# EAGLE board LN sensor (EAGLE 9.6.2)
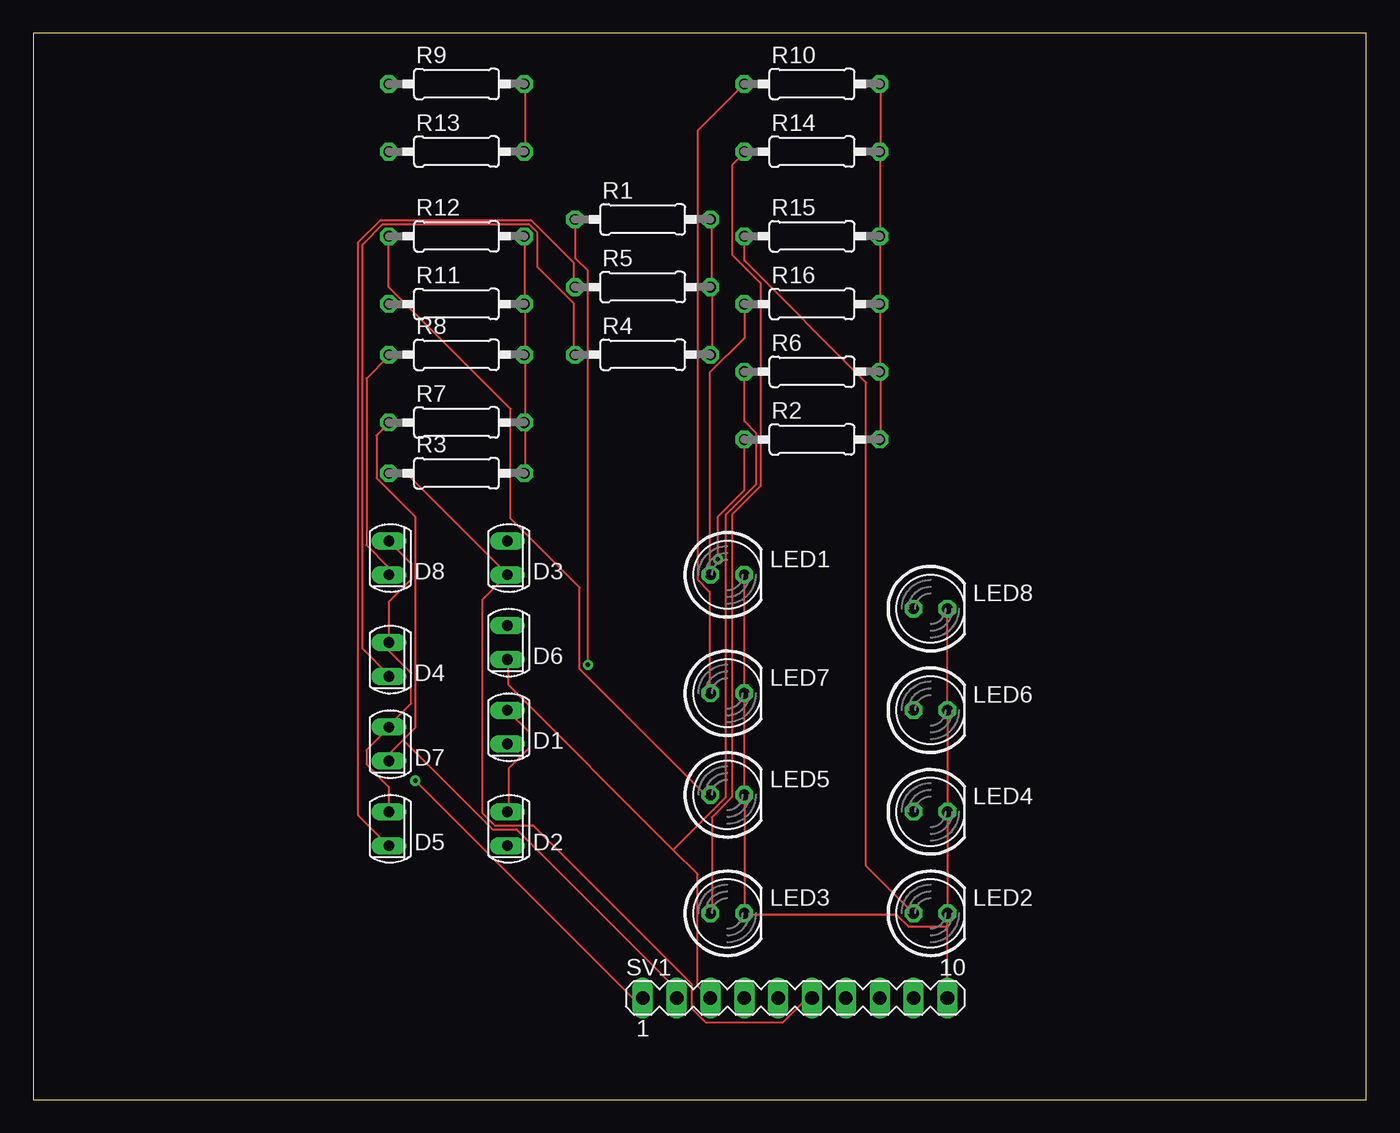
[diagram p0: board, top side]
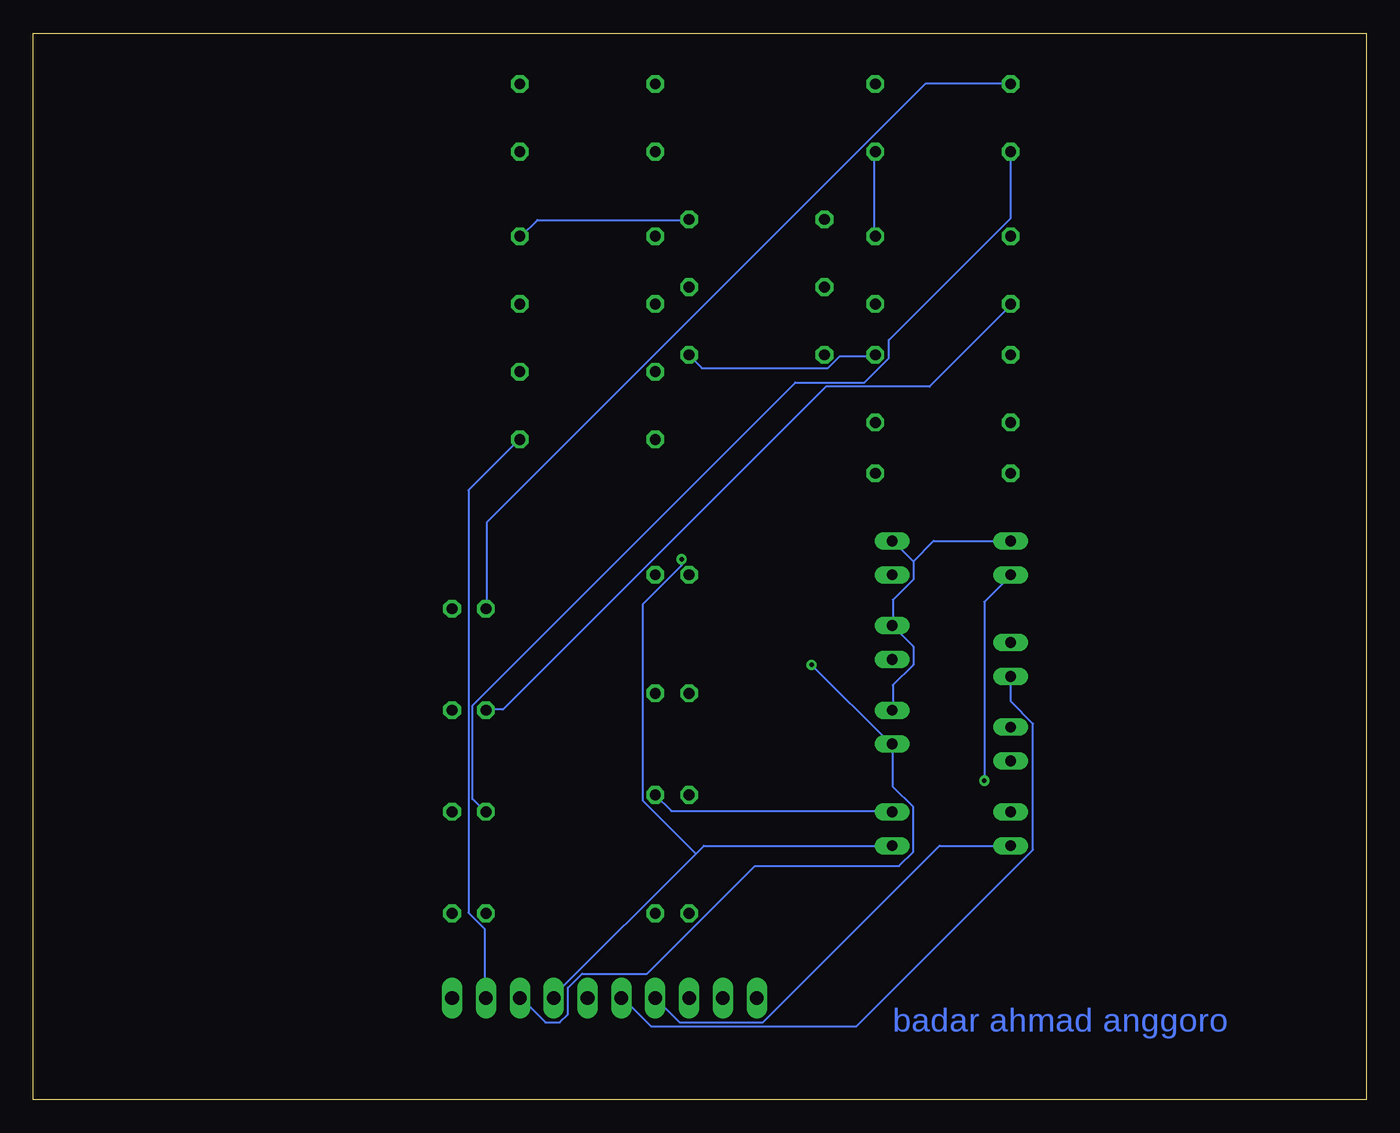
[diagram p1: board, bottom side, seen from below]

Size 100 x 80 mm. Coordinates in mm from the lower left corner, seen from the top.
Outline: 0,0 100,0 100,80 0,80 0,0
Copper layers (1*16): Top 0.035mm / dielectric 1.5mm / Bottom 0.035mm
Design rules "default": minimum track width 6mil, minimum drill 0.35mm, track to track 6mil, track to pad 6mil, pad to pad 6mil, via to via 6mil, smd to smd 6mil, copper to edge 40mil, drill to drill 6mil, minimum pad ring 10mil, minimum via ring 8mil, stop-mask expansion 4mil, vias tented up to drill 0mil, thermal gap 10mil

## Footprints (pad centres in the part's own frame; a part is rotated, then mirrored left to right if it is on the bottom)
SFH225 = drill 0.813 long: A 0,1.27; K 0,-1.27
LED5MM = drill 0.813 octagon: A -1.27,0; K 1.27,0
0207/10 = drill 0.813 octagon: 1 -5.08,0; 2 5.08,0
MA10-1 = drill 1.016 long: 1 -11.43,0; 2 -8.89,0; 3 -6.35,0; 4 -3.81,0; 5 -1.27,0; 6 1.27,0; 7 3.81,0; 8 6.35,0; 9 8.89,0; 10 11.43,0

## Placement (x,y rotation side)
D1  PhotoDioda  [SFH225]  35.56,27.94 0 top
D2  PhotoDioda  [SFH225]  35.56,20.32 0 top
D3  PhotoDioda  [SFH225]  35.56,40.64 0 top
D4  PhotoDioda  [SFH225]  26.67,33.02 0 top
D5  PhotoDioda  [SFH225]  26.67,20.32 0 top
D6  PhotoDioda  [SFH225]  35.56,34.29 0 top
D7  PhotoDioda  [SFH225]  26.67,26.67 0 top
D8  PhotoDioda  [SFH225]  26.67,40.64 0 top
LED1  LED putih SB  [LED5MM]  52.07,39.37 0 top
LED2  LED putih SB  [LED5MM]  67.31,13.97 0 top
LED3  LED putih SB  [LED5MM]  52.07,13.97 0 top
LED4  LED putih SB  [LED5MM]  67.31,21.59 0 top
LED5  LED putih SB  [LED5MM]  52.07,22.86 0 top
LED6  LED putih SB  [LED5MM]  67.31,29.21 0 top
LED7  LED putih SB  [LED5MM]  52.07,30.48 0 top
LED8  LED putih SB  [LED5MM]  67.31,36.83 0 top
R1  [0207/10]  45.72,66.04 0 top
R2  [0207/10]  58.42,49.53 0 top
R3  [0207/10]  31.75,46.99 0 top
R4  [0207/10]  45.72,55.88 0 top
R5  [0207/10]  45.72,60.96 0 top
R6  [0207/10]  58.42,54.61 0 top
R7  [0207/10]  31.75,50.8 0 top
R8  [0207/10]  31.75,55.88 0 top
R9  330  [0207/10]  31.75,76.2 0 top
R10  330  [0207/10]  58.42,76.2 0 top
R11  330  [0207/10]  31.75,59.69 0 top
R12  330  [0207/10]  31.75,64.77 0 top
R13  330  [0207/10]  31.75,71.12 0 top
R14  330  [0207/10]  58.42,71.12 0 top
R15  330  [0207/10]  58.42,64.77 0 top
R16  330  [0207/10]  58.42,59.69 0 top
SV1  [MA10-1]  57.15,7.62 0 top

## Library data of the parts
D1-D8 = opto-trans-siemens
LED1-LED8 = led
R1-R16 = resistor
SV1 = con-lstb

## Nets
GND: D1.A D2.A D3.A D4.A D5.A D6.A D7.A D8.A LED1.K LED2.K LED3.K LED4.K LED5.K LED6.K LED7.K LED8.K SV1.10
N$1: LED7.A R10.1
N$2: D7.K R7.1 SV1.2
N$3: D8.K R8.1 SV1.1
N$4: D1.K R1.1 SV1.8
N$5: D2.K R2.1 SV1.7
N$6: D3.K R3.1 SV1.6
N$7: D5.K R5.1 SV1.4
N$8: D4.K R4.1 SV1.5
N$9: D6.K R6.1 SV1.3
N$10: LED6.A R11.1
N$11: LED5.A R12.1
N$12: LED4.A R13.1
N$13: LED3.A R14.1
N$14: LED2.A R15.1
N$15: LED1.A R16.1
N$16: LED8.A R9.1
VCC: R1.2 R2.2 R3.2 R4.2 R5.2 R6.2 R7.2 R8.2 R9.2 R10.2 R11.2 R12.2 R13.2 R14.2 R15.2 R16.2 SV1.9

## Tracks (layer width: path | path; a pad name or v marks a point on that pad's centre or on a via)
GND
  Top 0.152: D5.A 26.67,23.47 24.99,25.15 24.99,26.21 26.67,27.89 D7.A 26.67,28.04 28.35,29.72 28.35,32 26.67,33.68 D4.A 26.67,37.34 28.35,39.01 28.35,40.23 D8.A | D1.A 37.19,27.58 37.19,26.36 35.66,24.84 35.66,21.64 D2.A | LED1.K LED7.K LED5.K LED3.K 53.34,13.87 64.77,13.87 65.68,12.95 68.58,12.95 | SV1.10 68.58,12.95 | 68.58,12.95 LED2.K LED4.K LED6.K LED8.K
  Bottom 0.152: 33.98,40.39 33.98,39.01 35.51,37.49 35.51,35.66 D6.A 33.98,33.98 33.98,32.61 35.51,31.09 35.51,29.26 D1.A | 33.98,40.39 35.51,41.91 D3.A | D8.A 32.46,41.91 33.98,40.39 | LED5.K 52.12,21.64 35.66,21.64 D2.A
N$1
  Top 0.152: R10.1 49.84,72.69 49.84,39.01 50.75,38.1 50.75,30.48 LED7.A
N$2
  Top 0.152: D7.K 26.67,25.91 27.74,26.98 | 27.74,26.98 28.65,27.89 28.65,43.74 25.76,46.63 25.76,49.84 26.67,50.75 R7.1 | 27.74,26.98 34.44,20.27 36.27,20.27 48.16,8.38 48.16,7.62 SV1.2
N$3  (via drill 0.35)
  Top 0.152: D8.K 26.67,39.93 24.99,41.6 24.99,54.1 26.67,55.78 R8.1 | SV1.1 44.96,7.62 v28.65,23.93
  Bottom 0.152: v28.65,23.93 28.65,37.34 26.67,39.32 D8.K
N$4  (via drill 0.35)
  Top 0.152: v41.6,32.61 41.6,62.18 40.69,63.09 40.69,65.99 R1.1
  Bottom 0.152: SV1.8 63.4,7.62 61.57,5.79 60.5,5.79 59.89,6.4 59.89,8.38 58.83,9.45 53.95,9.45 45.87,17.53 35.05,17.53 33.98,18.59 33.98,21.95 35.51,23.47 35.51,26.67 D1.K 35.66,26.67 v41.6,32.61
N$5  (via drill 0.35)
  Top 0.152: R2.1 53.34,45.72 51.36,43.74 v51.36,40.54
  Bottom 0.152: D2.K 49.68,19.05 50.29,18.44 | 50.29,18.44 60.96,7.77 SV1.7 | v51.36,40.54 51.36,40.08 54.25,37.19 54.25,22.4 50.29,18.44
N$6
  Top 0.152: R3.1 26.67,46.94 28.04,46.94 35.51,39.47 D3.K 33.68,37.49 33.68,21.49 34.59,20.57 37.49,20.57 49.38,8.69 49.38,6.86 50.44,5.79 56.24,5.79 58.06,7.62 SV1.6
N$7
  Top 0.152: D5.K 24.38,21.34 24.38,64.31 26.06,65.99 37.34,65.99 40.54,62.79 40.54,60.96 R5.1
  Bottom 0.152: D5.K 32,19.05 45.26,5.79 51.51,5.79 SV1.4
N$8
  Top 0.152: R4.1 40.54,55.93 40.54,59.74 37.8,62.48 37.8,65.08 37.19,65.68 26.21,65.68 24.69,64.16 24.69,33.83 26.67,31.85 D4.K
  Bottom 0.152: D4.K 26.67,29.87 24.99,28.19 24.99,18.75 38.25,5.49 53.65,5.49 55.78,7.62 SV1.5
N$9
  Top 0.152: 48.01,18.75 49.84,16.92 49.84,8.53 50.75,7.62 SV1.3 | 48.01,18.75 35.66,31.09 35.66,32.92 D6.K | R6.1 53.34,50.9 54.25,49.99 54.25,46.18 51.97,43.89 51.97,22.71 48.01,18.75
N$10
  Bottom 0.152: LED6.A 65.99,29.26 64.77,29.26 40.54,53.49 32.77,53.49 26.67,59.59 R11.1
N$11
  Top 0.152: R12.1 26.67,60.96 35.81,51.82 35.81,43.59 41,38.41 41,32.31 50.44,22.86 LED5.A
N$12
  Bottom 0.152: R13.1 26.67,66.14 35.81,57 35.81,55.63 37.64,53.8 42.82,53.8 67.06,29.57 67.06,22.55 66.14,21.64 LED4.A
N$13
  Top 0.152: LED3.A 50.9,14.02 50.9,21.18 52.43,22.71 52.43,43.89 54.56,46.02 54.56,61.27 52.43,63.4 52.43,70.1 53.34,71.02 R14.1
N$14
  Top 0.152: R15.1 53.34,62.94 62.48,53.8 62.48,17.53 LED2.A
N$15
  Top 0.152: R16.1 53.34,57.15 50.75,54.56 50.75,39.47 LED1.A
N$16
  Bottom 0.152: R9.1 33.07,76.2 65.99,43.28 65.99,36.88 LED8.A
VCC
  Top 0.152: R13.2 36.88,71.17 36.88,76.2 R9.2 | R3.2 36.88,47.09 36.88,50.75 R7.2 36.88,50.9 36.88,55.78 R8.2 36.88,55.93 36.88,59.59 R11.2 36.88,59.74 36.88,64.77 R12.2 | 50.9,60.96 50.9,55.93 R4.2 | 50.9,60.96 50.9,65.99 R1.2 | 50.9,60.96 R5.2 | R10.2 63.55,76.2 63.55,71.17 R14.2 63.55,71.02 63.55,64.77 | R2.2 63.55,49.53 63.55,54.56 R6.2 63.55,54.71 63.55,59.59 R16.2 63.55,59.74 63.55,64.77 | 63.55,64.77 R15.2
  Bottom 0.152: R13.2 36.88,71.02 36.88,64.77 R12.2 | SV1.9 66.14,7.62 66.14,12.8 67.36,14.02 67.36,45.72 63.55,49.53 R2.2 | R1.2 50.9,65.99 62.18,65.99 63.4,64.77 R15.2 | R8.2 36.88,55.78 39.47,55.78 40.39,54.86 49.84,54.86 50.75,55.78 R4.2

## Text on the board
Bottom: badar ahmad anggoro